# EAGLE board HackmodWear (EAGLE 9.1.0)
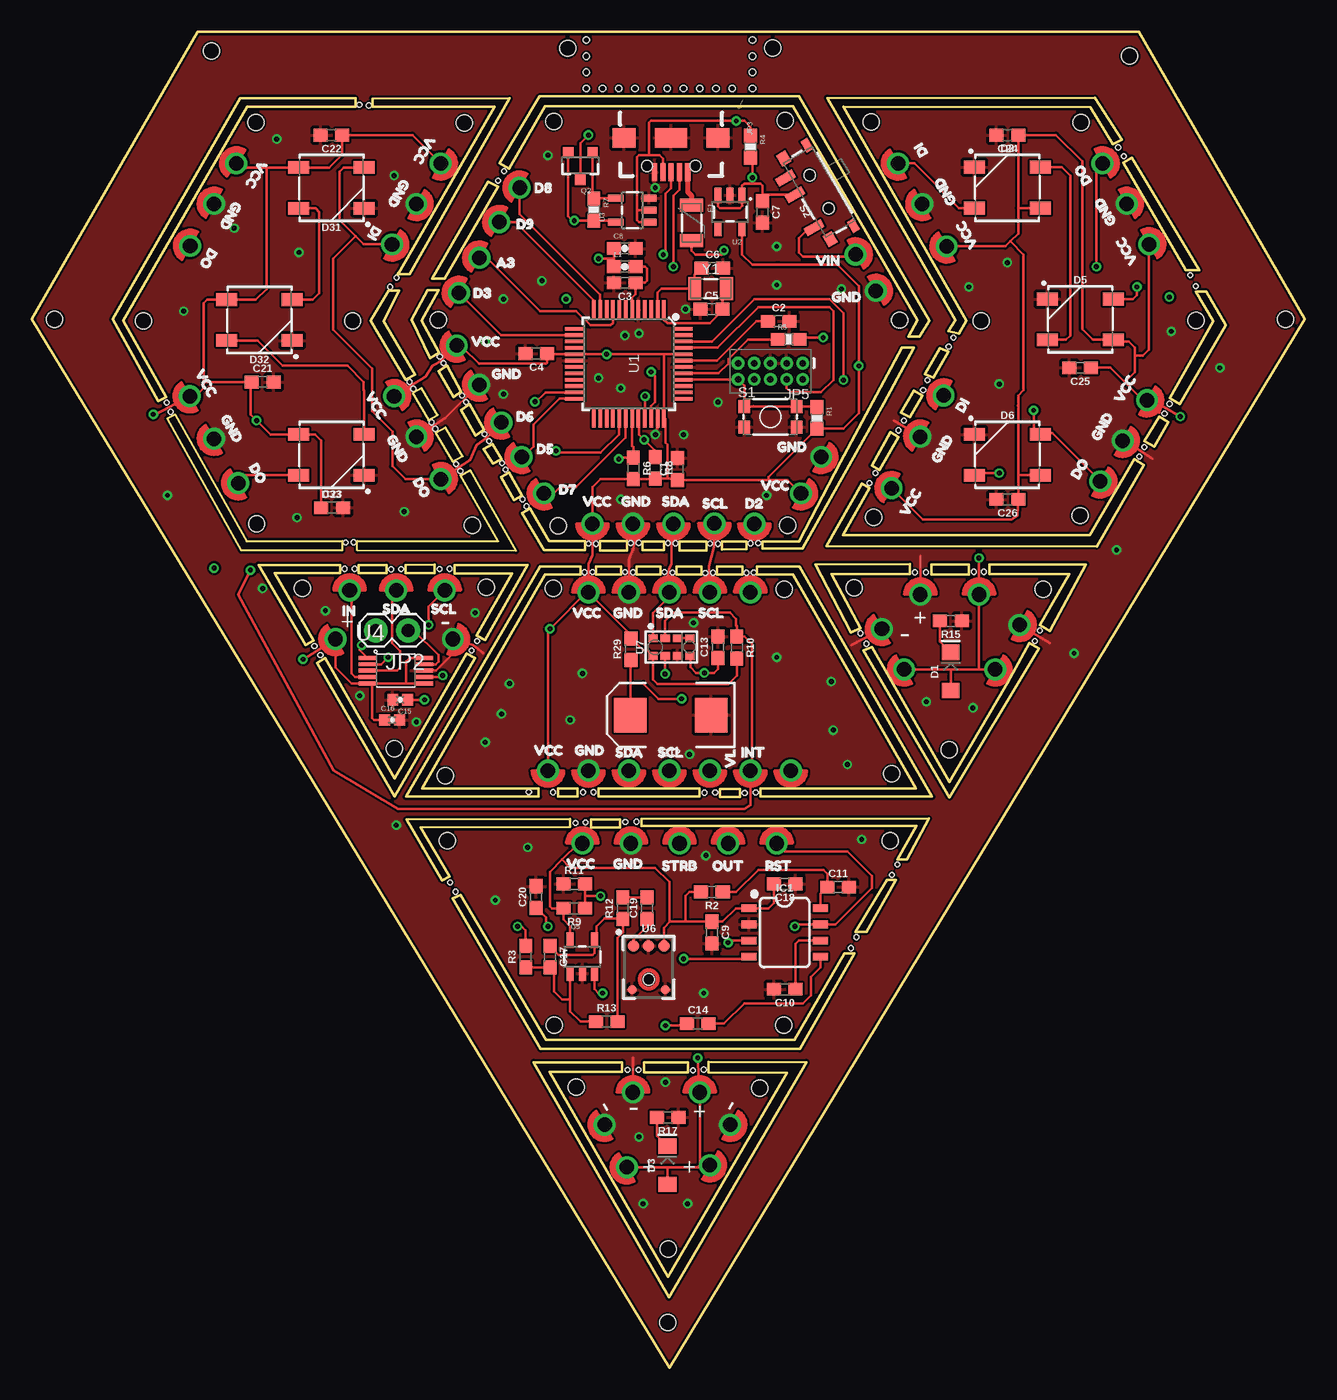
[diagram p0: board, top side]
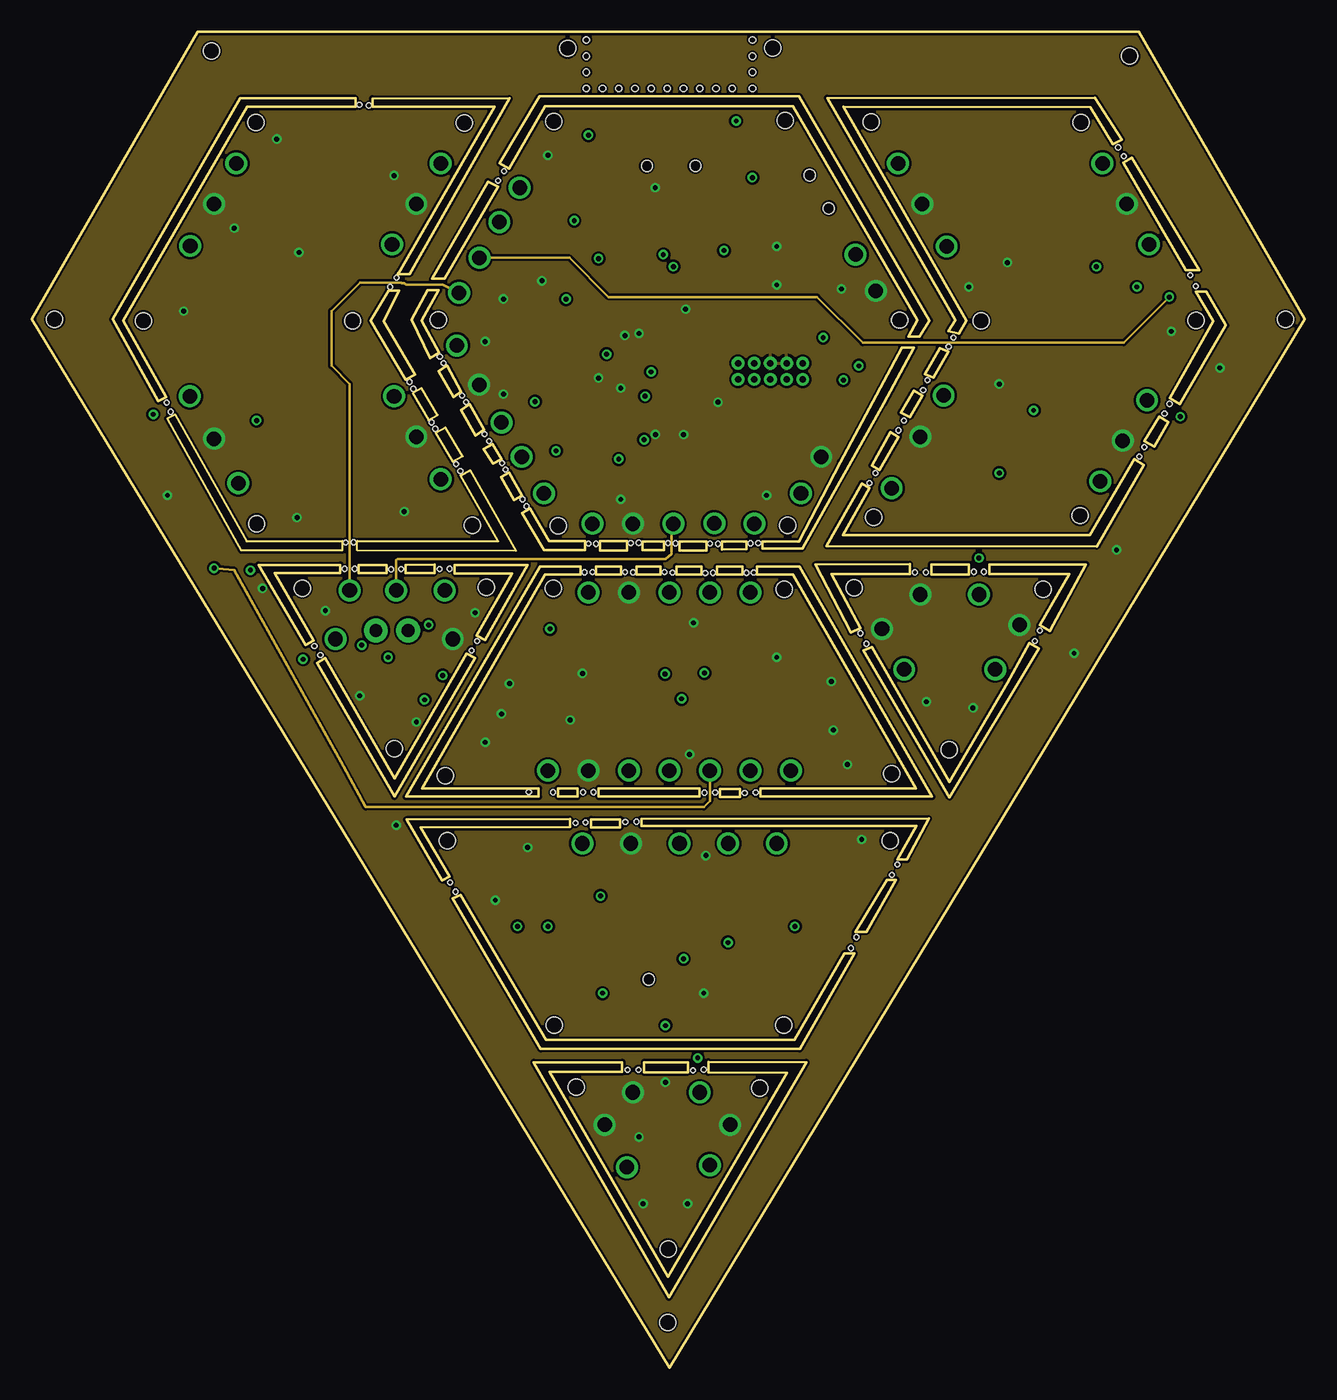
[diagram p1: board, inner layer Route2]
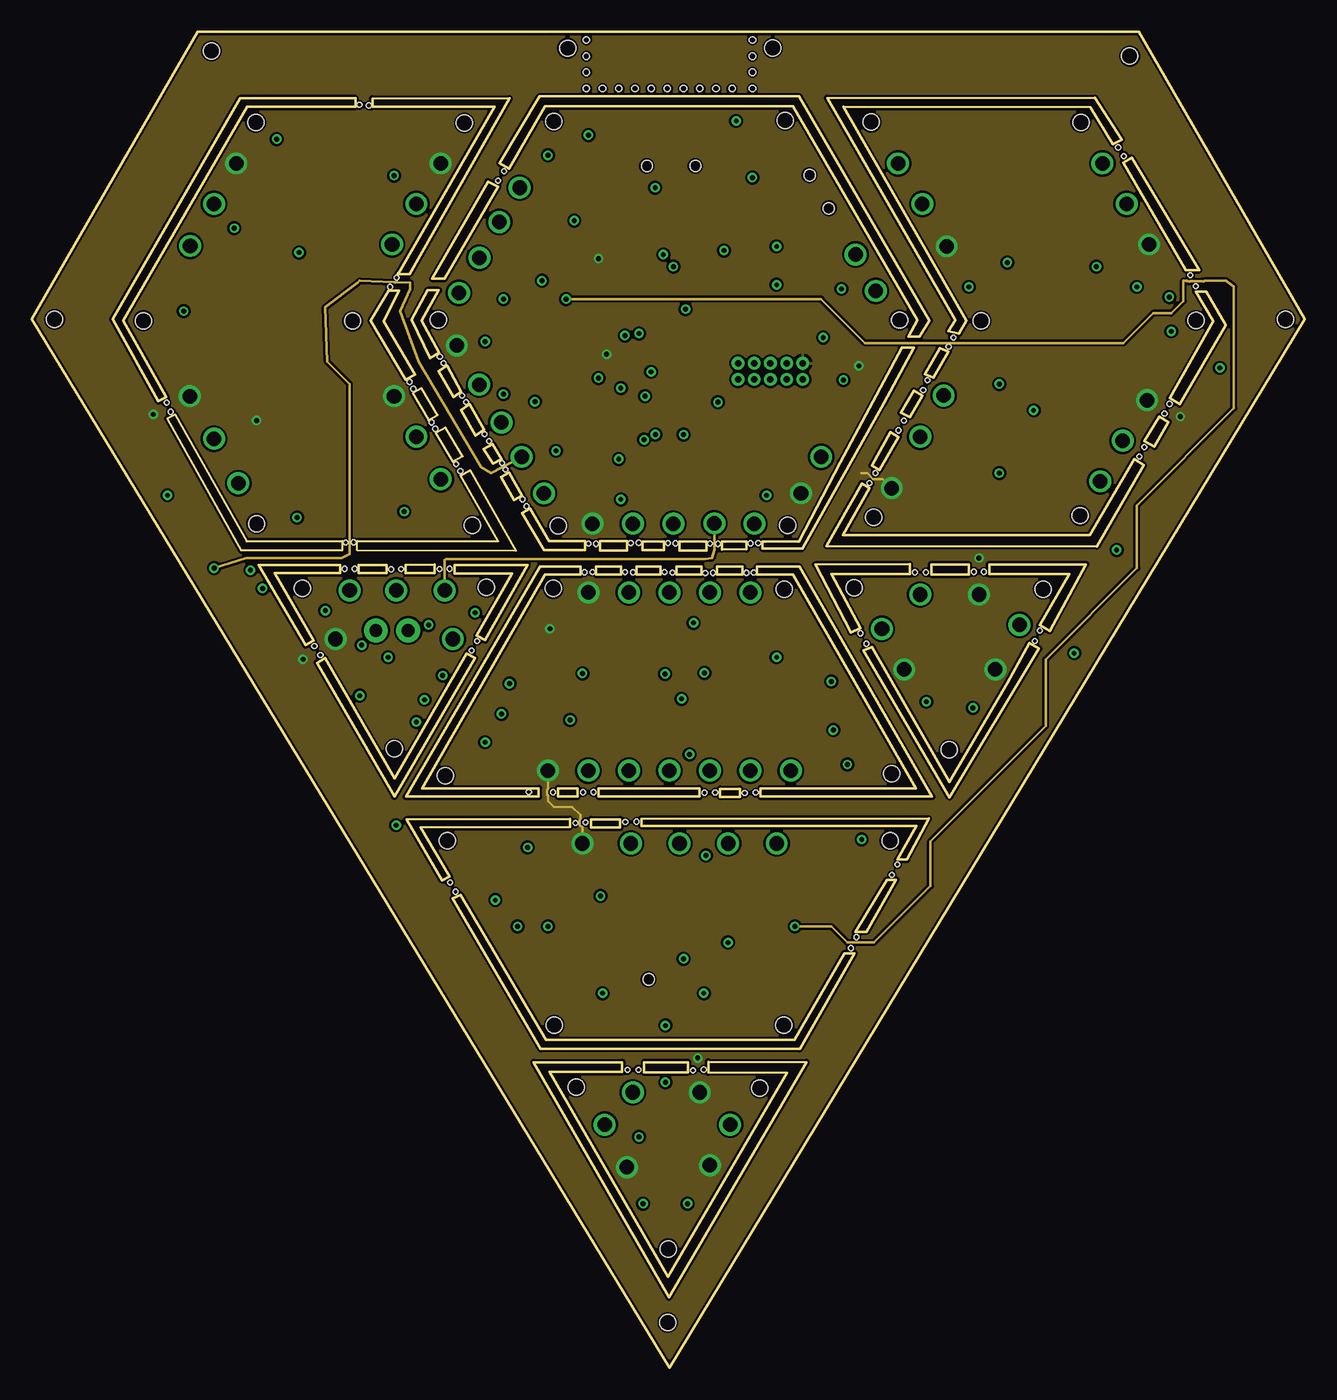
[diagram p2: board, inner layer Route15]
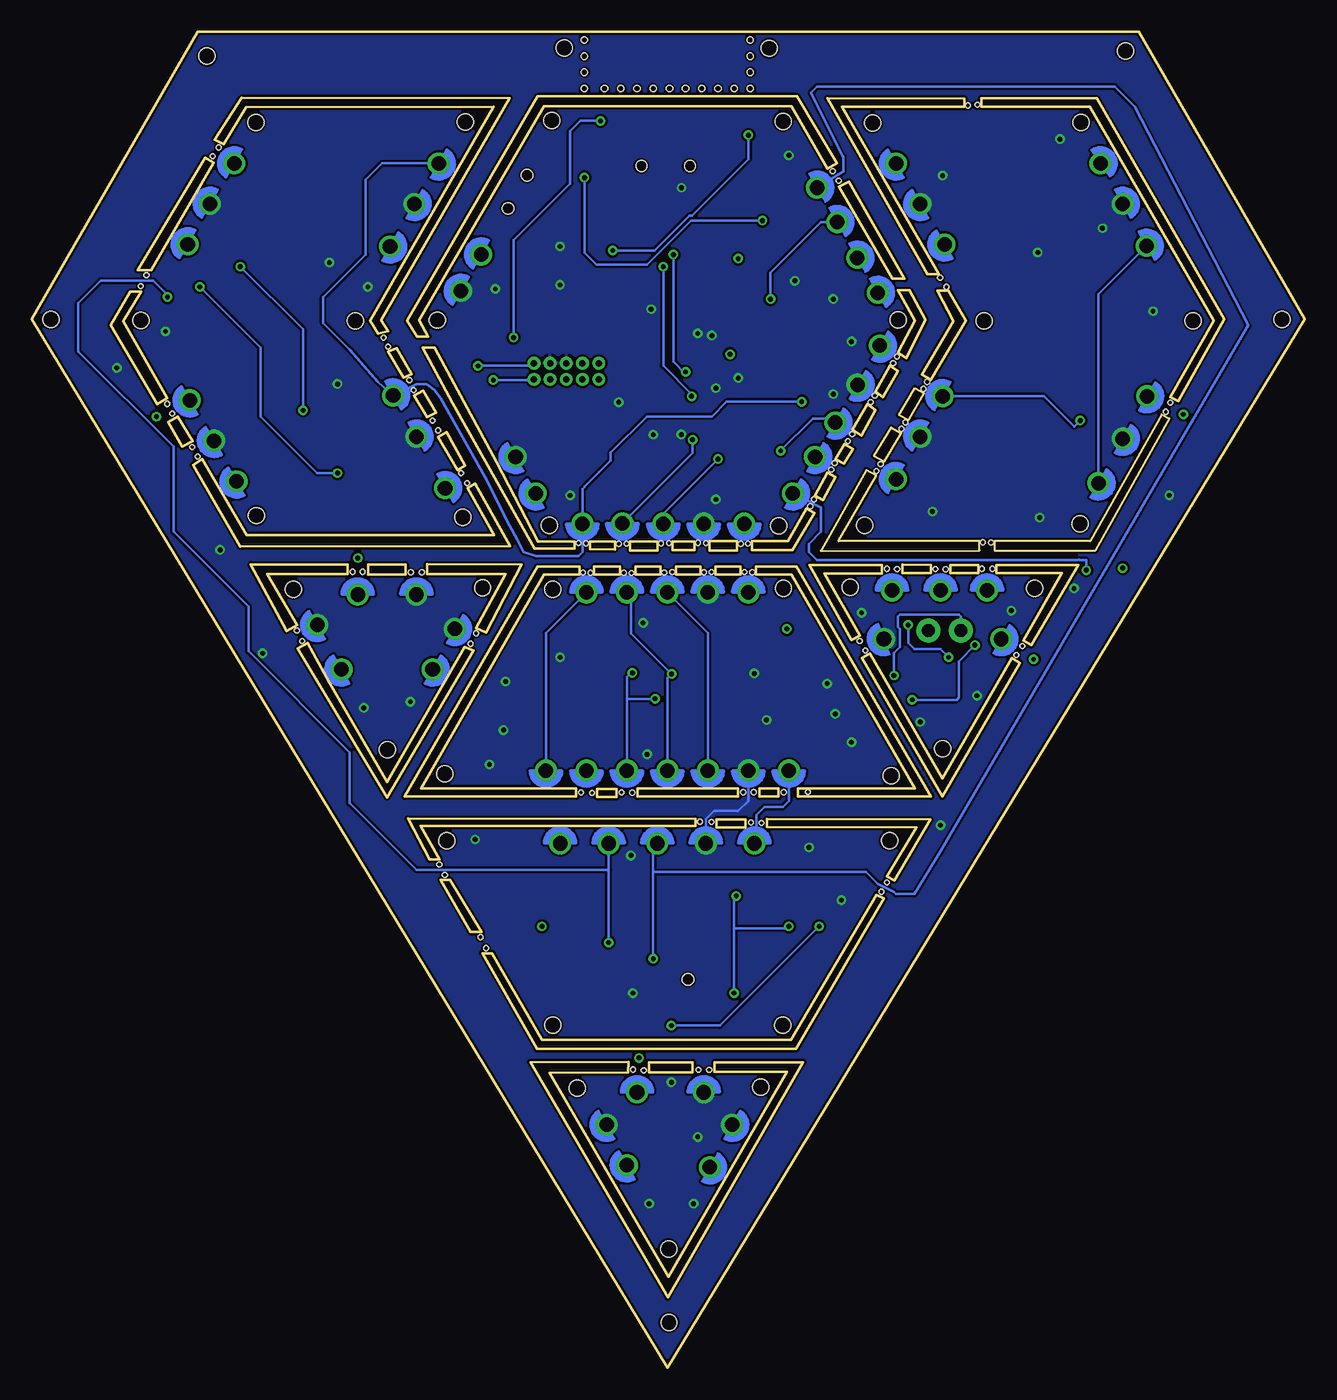
[diagram p3: board, bottom side, seen from below]

Size 99.85 x 104.77 mm. Coordinates in mm from the lower left corner, seen from the top.
Outline: 292 segments
Copper layers (1*2*15*16): Top 0.035559375mm / dielectric 0.47751875mm / Route2 0.035559375mm / dielectric 0.47751875mm / Route15 0.035559375mm / dielectric 0.47751875mm / Bottom 0.035559375mm
Design rules "SparkFun-4-layer-TIGHT": minimum track width 7mil, minimum drill 15mil, track to track 7mil, track to pad 7mil, pad to pad 7mil, via to via 7mil, smd to smd 7mil, copper to edge 7mil, drill to drill 7mil, minimum pad ring 7mil, minimum via ring 7mil, stop-mask expansion 4mil, vias tented up to drill 25mil, thermal gap 10mil
Holes 1.27 mm at 32.43,46.41 34.54,66.06 79.33,61.05 33.91,97.63 40.97,26.87 67.31,41.33 59.28,66.06 21.21,61.14 28.42,48.54 42.03,103.49 58.99,26.86 35.66,61.21 86.12,102.87 65.84,97.69 66.04,66.69 82.28,97.69 40.9,61.12 59,61.05 41.28,66.02 31.89,82.19 40.93,97.76 49.88,3.54 8.76,82.12 17.56,97.66 17.63,66.2 71.96,48.48 74.47,82.11 64.5,61.18 67.45,46.58 82.23,66.83 58.1,103.5 25.16,82.09 14.08,103.27 42.7,22 57.08,21.94 32.58,41.34 59.09,97.83 68.05,82.16 91.3,82.14 49.91,9.32 1.79,82.22 98.34,82.23
Holes 0.51 mm at 43.5,100.33 43.5,101.6 43.5,102.87 43.5,104.14 56.52,100.33 56.52,101.6 56.52,102.87 56.52,104.14 48.58,100.33 47.31,100.33 46.04,100.33 44.77,100.33 53.66,100.33 52.39,100.33 51.12,100.33 49.85,100.33 54.93,100.33
Holes 0.38 mm at 25.69,99.05 26.43,99 28.61,85.49 28.11,84.77 29.63,77.32 29.92,76.78 31.34,74.15 31.65,73.64 33.27,70.89 33.6,70.33 32,79.29 32.3,78.78 33.74,76.23 34.06,75.72 35.51,73.23 35.85,72.66 36.88,70.96 37.16,70.43 38.49,68.1 38.8,67.56 43.68,64.65 44.25,64.62 46.98,64.67 47.6,64.7 49.89,64.69 50.5,64.66 53.2,64.64 53.82,64.62 56.38,64.66 56.97,64.67 56.05,62.35 56.62,62.38 53.43,62.35 52.82,62.34 50.25,62.36 49.62,62.4 47.14,62.39 46.53,62.41 43.97,62.4 43.35,62.39 24.61,64.73 25.25,64.74 24.52,62.66 25.32,62.66 28.18,62.62 28.97,62.64 31.98,62.64 32.78,62.66 34.93,56.99 34.48,56.25 22.16,56.6 22.63,55.89 38.98,45.15 40.88,45.13 43.23,45.13 44.06,45.13 52.76,45.09 53.61,45.1 55.92,45.07 56.78,45.1 42.63,42.72 43.43,42.77 46.55,42.79 47.43,42.82 32.79,38.07 33.22,37.33 67.46,38.64 67.89,39.47 64.67,33.76 64.24,32.9 51.85,23.32 52.71,23.37 46.72,23.35 47.57,23.36 65,57.6 65.46,56.78 79.07,57.8 78.66,57 74.69,62.43 73.9,62.43 70.13,62.39 69.27,62.39 87.27,72.21 86.86,71.47 89.24,75.6 88.85,74.83 91.31,84.82 90.87,85.68 85.66,95.03 85.2,95.71 72.28,80.8 71.91,80.08 70.24,77.45 69.91,76.69 68.41,74.29 67.98,73.51 66.18,70.17 65.71,69.37 36.56,93.1 37.03,93.83 10.57,75.7 10.9,74.97

## Footprints (pad centres in the part's own frame; a part is rotated, then mirrored left to right if it is on the bottom)
0603 = smd 1.1 x 1: 1 -0.85,0; 2 0.85,0
0603-CAP = smd 1.1 x 1: 1 -0.85,0; 2 0.85,0
EIA7343 = smd 2.55 x 2.7: A 3.17,0; C -3.17,0
0402-CAP = smd 0.85 x 0.9: 1 -0.58,0; 2 0.58,0
LED-1206 = smd 1.2 x 1.4: A -1.5,0; C 1.5,0
WS2812B = smd 1.651 x 1: 1 2.577,-1.6; 2 2.577,1.6; 3 -2.577,1.6; 4 -2.577,-1.6
PTC-1206 = smd 1 x 1.8: 1 -1.4,0; 2 1.4,0
SO08 = smd 0.6 x 1.2: 1 -1.905,-2.8; 2 -0.635,-2.8; 3 0.635,-2.8; 4 1.905,-2.8; 5 1.905,2.8; 6 0.635,2.8; 7 -0.635,2.8; 8 -1.905,2.8
1X01 = drill 1.143: P$1 0,0
1X02@1 = drill 1.016 pad 1.88: 1 0,0; 2 2.54,0
USB-AB-MICRO-SMD_V03 = smd 1.4 x 0.4: D+1 2.7,0; D-1 2.7,0.65; GND1 2.7,-1.3; ID1 2.7,-0.65; VBUS1 2.7,1.3 | smd 1.5 x 1.8: SHIELD1 0,3.68; SHIELD3 0,-3.68 | smd 1.5 x 2.5: SHIELD2 0,0 | hole 0.85: 2.2,1.9; 2.2,-1.9
2X5-PTH-1.27MM = drill 0.508 pad 1: 1 -2.54,-0.635; 2 -2.54,0.635; 3 -1.27,-0.635; 4 -1.27,0.635; 5 0,-0.635; 6 0,0.635; 7 1.27,-0.635; 8 1.27,0.635; 9 2.54,-0.635; 10 2.54,0.635
SOT23-3 = smd 0.8 x 0.9: 1 -0.95,-1; 2 0.95,-1; 3 0,1.1
0603-RES@1 = smd 1.1 x 1: 1 -0.85,0; 2 0.85,0
TACTILE_SWITCH_SMD_4.6X2.8MM = smd 0.9 x 1: 1 -2.05,-0.8; 2 2.05,-0.8; 3 2.05,0.8; 4 -2.05,0.8
SWITCH_SPST_SMD_A = smd 0.7 x 1.5: 1 -2.25,-1.75; 2 -0.75,-1.75; 3 2.25,-1.75 | smd 1 x 0.6: GND1 -3.65,1; GND3 3.65,1 | smd 1 x 0.8: GND2 -3.65,-1.1; GND4 3.65,-1.1 | hole 0.9: -1.5,0; 1.5,0
TQFP-48 = smd 1.5 x 0.28: 1 -4.25,2.75; 2 -4.25,2.25; 3 -4.25,1.75; 4 -4.25,1.25; 5 -4.25,0.75; 6 -4.25,0.25; 7 -4.25,-0.25; 8 -4.25,-0.75; 9 -4.25,-1.25; 10 -4.25,-1.75; 11 -4.25,-2.25; 12 -4.25,-2.75; 25 4.25,-2.75; 26 4.25,-2.25; 27 4.25,-1.75; 28 4.25,-1.25; 29 4.25,-0.75; 30 4.25,-0.25; 31 4.25,0.25; 32 4.25,0.75; 33 4.25,1.25; 34 4.25,1.75; 35 4.25,2.25; 36 4.25,2.75 | smd 0.28 x 1.5: 13 -2.75,-4.25; 14 -2.25,-4.25; 15 -1.75,-4.25; 16 -1.25,-4.25; 17 -0.75,-4.25; 18 -0.25,-4.25; 19 0.25,-4.25; 20 0.75,-4.25; 21 1.25,-4.25; 22 1.75,-4.25; 23 2.25,-4.25; 24 2.75,-4.25; 37 2.75,4.25; 38 2.25,4.25; 39 1.75,4.25; 40 1.25,4.25; 41 0.75,4.25; 42 0.25,4.25; 43 -0.25,4.25; 44 -0.75,4.25; 45 -1.25,4.25; 46 -1.75,4.25; 47 -2.25,4.25; 48 -2.75,4.25
SOT23-5 = smd 0.55 x 1.2: 1 -0.95,-1.3; 2 0,-1.3; 3 0.95,-1.3; 4 0.95,1.3; 5 -0.95,1.3
VSSOP-10 = smd 1.45 x 0.3: P$1 -1.905,1.06; P$2 -1.905,0.56; P$3 -1.905,0.06; P$4 -1.905,-0.44; P$5 -1.905,-0.94; P$6 2.495,-0.94; P$7 2.495,-0.44; P$8 2.495,0.06; P$9 2.495,0.56; P$10 2.495,1.06
ADMP401 = smd 0.9 x 0.9: 1 -1.2,2.62; 5 1.2,2.62; 6 0,2.62 | smd 0.7 x 0.7: 2 1.3,-0.8; 4 -1.3,-0.8 | hole 0.9: 0,0
APDS-9960 = smd 0.6 x 0.72: 1 0.7,1.455; 2 0.7,0.485; 3 0.7,-0.485; 4 0.7,-1.455; 5 -0.7,-1.455; 6 -0.7,-0.485; 7 -0.7,0.485; 8 -0.7,1.455
CRYSTAL-SMD-3.2X1.5MM = smd 1 x 1.8: P$1 -1.25,0; P$2 1.25,0

## Placement (x,y rotation side)
C1  0.1uF  [0603]  50.64,70.48 90 top
C2  0.1uF  [0603]  58.58,82.07 0 top
C3  0.1uF  [0603]  46.51,85.09 180 top
C4  0.1uF  [0603]  39.56,79.53 180 top
C5  15pF  [0603]  53.31,83.02 0 top
C6  15pF  [0603]  53.37,86.24 0 top
C7  0.1uF  [0603]  57.31,90.65 270 top
C8  2.2uF  [0603-CAP]  46.51,87.79 0 top
C9  0.1uF  [0603]  53.34,34.13 270 top
C10  0.1uF  [0603]  59.05,29.69 180 top
C11  33pF  [0603]  63.25,37.69 0 top
C12  100uF  [EIA7343]  50.11,51.19 180 top
C13  1.0uF  [0603]  53.82,56.52 90 top
C14  10nF  [0603]  52.23,26.99 0 top
C15  1.0uF  [0402-CAP]  28.89,52.39 180 top
C16  1.0uF  [0402-CAP]  28.26,50.8 0 top
C17  100pF  [0603]  40.64,32.23 270 top
C18  0.1uF  [0603]  59.05,37.94 180 top
C19  4.7uF  [0603]  48.26,36.04 90 top
C20  1.0uF  [0603]  39.55,36.91 90 top
C21  0.1uF  [0603]  18.1,77.31 0 top
C22  0.1uF  [0603]  23.49,96.68 180 top
C23  0.1uF  [0603]  23.55,67.45 0 top
C24  0.1uF  [0603]  76.52,96.68 180 top
C25  0.1uF  [0603]  82.23,78.42 180 top
C26  0.1uF  [0603]  76.52,68.1 180 top
D1  [LED-1206]  72.07,54.61 90 top
D2  WS2812B  [WS2812B]  76.52,92.55 0 top
D3  [LED-1206]  49.85,15.88 90 top
D5  WS2812B  [WS2812B]  82.24,82.22 0 top
D6  WS2812B  [WS2812B]  76.52,71.6 0 top
D31  WS2812B  [WS2812B]  23.5,92.53 180 top
D32  WS2812B  [WS2812B]  17.85,82.17 180 top
D33  WS2812B  [WS2812B]  23.49,71.6 180 top
F1  500mA  [PTC-1206]  51.75,89.79 270 top
IC1  MSGEQ7N  [SO08]  59.05,34.13 270 top
J1  [1X01]  23.81,57.15 120 top
J2  [1X01]  28.57,60.96 0 top
J3  [1X01]  38.42,71.44 120 top
J4  [1X01]  32.39,60.96 0 top
J5  [1X01]  40.16,68.58 120 top
J6  [1X01]  35.08,77.1 120 top
J7  [1X01]  67.44,68.98 60 top
J8  [1X01]  38.26,92.55 60 top
J9  [1X01]  36.67,89.85 60 top
J10  [1X01]  35.11,87.05 60 top
J11  [1X01]  47.15,66.2 180 top
J12  [1X01]  50.32,66.2 180 top
J13  [1X01]  50.01,46.83 180 top
J14  [1X01]  56.67,66.2 180 top
J15  [1X01]  53.18,60.8 0 top
J16  [1X01]  50.01,60.8 0 top
J17  [1X01]  43.66,60.8 0 top
J18  [1X01]  36.83,74.14 120 top
J19  [1X01]  46.83,60.8 0 top
J20  [1X01]  33.02,57.15 250 top
J21  [1X01]  59.53,46.83 180 top
J22  [1X01]  24.92,60.96 0 top
J23  [1X01]  33.5,84.3 60 top
J24  [1X01]  53.18,46.83 180 top
J25  [1X01]  32.07,94.46 240 top
J26  [1X01]  32.07,69.69 300 top
J27  [1X01]  14.29,91.28 60 top
J28  [1X01]  40.48,46.83 180 top
J29  [1X01]  43.66,46.83 180 top
J30  [1X01]  43.18,41.12 0 top
J31  [1X01]  46.99,41.12 0 top
J32  [1X01]  28.26,88.11 240 top
J33  [1X01]  30.16,73.02 300 top
J34  [1X01]  28.42,76.2 300 top
J35  [1X01]  50.8,41.12 0 top
J36  [1X01]  58.42,41.12 0 top
J37  [1X01]  54.61,41.12 0 top
J38  [1X01]  53.54,66.23 180 top
J39  [1X01]  46.83,46.83 180 top
J40  [1X01]  56.36,46.83 180 top
J41  [1X01]  16.19,69.37 120 top
J42  [1X01]  71.52,76.25 60 top
J43  [1X01]  30.16,91.28 240 top
J44  [1X01]  16.03,94.46 55 top
J45  [1X01]  12.38,76.2 120 top
J46  [1X01]  14.29,72.87 120 top
J47  [1X01]  71.75,87.95 120 top
J48  [1X01]  83.98,94.46 300 top
J49  [1X01]  85.88,91.28 300 top
J50  [1X01]  83.8,69.52 240 top
J51  [1X01]  69.85,91.28 120 top
J52  [1X01]  87.63,88.11 300 top
J53  [1X01]  67.94,94.46 120 top
J54  [1X01]  12.42,87.99 60 top
J55  [1X01]  69.69,73.02 60 top
J56  [1X01]  33.34,80.17 120 top
J57  [1X01]  87.47,75.88 240 top
J58  [1X01]  85.57,72.71 240 top
J59  [1X01]  77.47,58.26 240 top
J60  [1X01]  75.56,54.77 240 top
J61  [1X01]  66.67,57.94 120 top
J62  [1X01]  68.42,54.77 120 top
J63  [1X01]  69.69,60.64 0 top
J64  [1X01]  74.3,60.64 0 top
J65  [1X01]  47.15,21.59 0 top
J66  [1X01]  53.18,15.88 240 top
J67  [1X01]  44.93,19.05 120 top
J68  [1X01]  46.67,15.72 120 top
J69  [1X01]  54.77,19.05 240 top
J70  [1X01]  52.39,21.59 0 top
J71  [1X01]  64.61,87.31 300 top
J72  [1X01]  66.2,84.45 300 top
J73  [1X01]  43.97,66.2 180 top
J74  [1X01]  56.36,60.8 0 top
J75  [1X01]  61.91,71.44 240 top
J76  [1X01]  60.33,68.58 240 top
JP2  [1X02@1]  29.52,57.83 180 top
JP3  [USB-AB-MICRO-SMD_V03]  50.15,96.46 270 top
JP5  CORTEX_DEBUGPTH  [2X5-PTH-1.27MM]  57.93,78.15 180 top
L1  FB - 30Ohm  [0603]  46.51,86.36 0 top
Q2  2.5A/30V  [SOT23-3]  43.02,94.3 180 top
R1  10K  [0603-RES@1]  61.58,74.49 270 top
R2  200k  [0603]  53.34,37.31 180 top
R3  22k  [0603]  38.73,32.23 90 top
R4  100k  [0603-RES@1]  56.36,95.77 270 top
R5  330  [0603-RES@1]  59.37,80.64 0 top
R6  2.2k  [0603]  47.18,70.54 270 top
R7  47K  [0603-RES@1]  44.09,90.83 270 top
R8  2.2k  [0603]  48.9,70.58 270 top
R9  10k  [0603]  42.55,36.04 180 top
R10  100k  [0603]  55.29,56.48 270 top
R11  10k  [0603]  42.55,37.94 0 top
R12  1.5k  [0603]  46.36,36.04 90 top
R13  100k  [0603]  45.09,27.15 0 top
R15  330  [0603]  72.09,58.58 180 top
R17  330  [0603]  49.89,19.63 180 top
R29  0  [0603]  46.99,56.36 90 top
S1  RESET  [TACTILE_SWITCH_SMD_4.6X2.8MM]  57.93,74.57 0 top
S2  [SWITCH_SPST_SMD_A]  61.75,92.23 300 top
U1  ATSAMD21G-A  [TQFP-48]  46.83,78.74 270 top
U2  3.3V  [SOT23-5]  54.77,90.65 180 top
U3  74AHC1G125  [SOT23-5]  47.1,90.79 90 top
U4  DRV2605L  [VSSOP-10]  28.26,54.61 0 top
U5  OPA344  [SOT23-5]  43.18,32.23 0 top
U6  ADMP401  [ADMP401]  48.39,30.45 0 top
U7  APDS-9960  [APDS-9960]  50.16,56.52 90 top
U$1  [GND2]  45.56,67.94 0 top
U$2  [A313]  35.72,86.68 0 top
U$3  [D517]  38.89,72.07 0 top
U$4  [D314]  33.81,84.3 0 top
U$5  [DO7]  16.99,71.44 300 top
U$6  [D616]  37.31,74.61 0 top
U$7  [D718]  40.64,68.9 0 top
U$8  [D811]  38.73,92.55 0 top
U$9  [D912]  37.31,89.69 0 top
U$10  [GND2]  14.76,75.25 300 top
U$11  [DI6]  27.46,90.01 240 top
U$12  [GND2]  35.4,77.95 0 top
U$13  [SCL5]  51.91,67.79 0 top
U$14  [SDA4]  48.74,67.94 0 top
U$15  [STRB8]  48.74,39.37 0 top
U$16  [VCC1]  41.12,39.53 0 top
U$17  [RST9]  56.83,39.37 0 top
U$18  [OUT10]  52.71,39.37 0 top
U$19  [GND2]  44.93,39.53 0 top
U$20  [VCC1]  41.59,59.21 0 top
U$21  [GND2]  44.93,59.21 0 top
U$22  [SDA4]  48.26,59.21 0 top
U$23  [SCL5]  51.59,59.21 0 top
U$24  [SCL5]  48.42,48.26 0 top
U$25  [SDA4]  45.09,48.26 0 top
U$26  [GND2]  57.79,72.23 0 top
U$27  [INT23]  54.93,48.26 0 top
U$28  [VL22]  54.77,46.35 90 top
U$29  [GND2]  41.91,48.42 0 top
U$30  [VCC21]  38.58,48.42 0 top
U$31  [VCC1]  56.36,69.22 0 top
U$32  [VCC1]  42.39,67.94 0 top
U$33  [VCC1]  33.66,80.49 0 top
U$34  [D219]  55.25,67.79 0 top
U$35  [VCC1]  12.7,78.9 300 top
U$36  [VIN20]  60.8,86.84 0 top
U$37  [GND2]  62.07,83.98 0 top
U$38  [GND2]  62.07,83.98 0 top
U$39  [VCC1]  18.57,95.25 240 top
U$40  [GND2]  29.69,93.66 240 top
U$41  [VCC1]  31.75,97.16 240 top
U$42  [GND2]  16.51,91.92 240 top
U$43  [DO7]  14.61,88.27 240 top
U$44  [VCC1]  26.04,77.15 300 top
U$45  [GND2]  27.78,73.66 300 top
U$46  [DO7]  29.84,70.33 300 top
U$47  [VCC1]  74.3,87.15 120 top
U$48  [VCC1]  86.84,85.88 120 top
U$49  [GND2]  72.55,90.65 120 top
U$50  [GND2]  85.09,89.06 120 top
U$51  [DI6]  70.33,94.46 120 top
U$52  [DO7]  83.18,92.23 120 top
U$53  [DO7]  81.44,69.22 60 top
U$54  [VCC1]  67.94,66.2 60 top
U$55  [GND2]  70.48,70.48 60 top
U$56  [GND2]  83.03,72.23 60 top
U$57  [DI6]  72.39,74.45 60 top
U$58  [VCC1]  84.77,75.09 60 top
U$59  [SDA4]  26.83,59.53 0 top
U$60  [SCL5]  30.64,59.53 0 top
U$62  [IN3]  23.65,59.37 0 top
Y1  32.768kHz  [CRYSTAL-SMD-3.2X1.5MM]  53.24,84.62 0 top

## Library data of the parts
C1-C4 C7 C9 C10 C18 C21-C26 = SparkFun-Capacitors; PROD_ID: CAP-00810
C5 C6 = SparkFun-Capacitors; PROD_ID: CAP-07881
C8 = SparkFun-Capacitors; PROD_ID: CAP-07888
C11 = SparkFun-Capacitors; PROD_ID: CAP-10142
C12 = SparkFun-Capacitors; PROD_ID: CAP-07890
C13 C20 = SparkFun-Capacitors; PROD_ID: CAP-00868
C14 = SparkFun-Capacitors; PROD_ID: CAP-00867
C15 C16 = SparkFun-Capacitors; PROD_ID: CAP-12417
C17 = SparkFun-Capacitors; PROD_ID: CAP-07883
C19 = SparkFun-Capacitors; PROD_ID: CAP-08280
D1 D3 = SparkFun-LED
D2 D5 D6 D31-D33 = SparkFun-LED; PROD_ID: DIO-12503
F1 = SparkFun-PowerIC; PROD_ID: RES-11150
IC1 = SparkFun-IC-Special-Function; PROD_ID: IC-10141
J1-J76 JP2 = SparkFun-Connectors
JP3 = SparkFun-Connectors; PROD_ID: CONN-11794
JP5 = samd21-temp
L1 = SparkFun-Passives; PROD_ID: RES-07859
Q2 = SparkFun-DiscreteSemi; PROD_ID: TRANS-11308
R1 R9 R11 = SparkFun-Resistors; PROD_ID: RES-00824
R2 = SparkFun-Resistors; PROD_ID: RES-09385
R3 = SparkFun-Resistors; PROD_ID: RES-07853
R4 R10 R13 = SparkFun-Resistors; PROD_ID: RES-07828
R5 R15 R17 = SparkFun-Resistors; PROD_ID: RES-00818
R6 R8 = SparkFun-Resistors; PROD_ID: RES-08272
R7 = SparkFun-Resistors; PROD_ID: RES-07871
R12 = SparkFun-Resistors; PROD_ID: RES-08306
R29 = SparkFun-Resistors; PROD_ID: RES-08609
S1 = samd21-temp; PROD_ID: SWCH-13065
S2 = SparkFun-Switches; PROD_ID: SWCH-10651; SF_SKU: COM-10860
U1 = samd21-temp; PROD_ID: IC-13064
U2 = SparkFun-PowerIC; PROD_ID: VREG-12457
U3 = SparkFun-DigitalIC; PROD_ID: IC-11920
U4 = SparkFun-PowerIC; PROD_ID: IC-13504
U5 = SparkFun
U6 = SparkFun-Sensors; PROD_ID: IC-09773
U7 = SparkFun-Sensors; PROD_ID: SEN-12005
U$1-U$60 U$62 = buzzard_labels(2)
Y1 = samd21-temp; PROD_ID: XTAL-13062

## Nets
3.3V: C1.1 C4.1 C8.1 C9.1 C16.1 C18.2 C21.1 C22.1 C23.1 C24.1 C25.1 C26.1 D1.A D2.1 D3.A D5.1 D6.1 D31.1 D32.1 D33.1 IC1.1 J1.P$1 J7.P$1 J17.P$1 J25.P$1 J28.P$1 J30.P$1 J34.P$1 J44.P$1 J45.P$1 J47.P$1 J52.P$1 J56.P$1 J57.P$1 J60.P$1 J62.P$1 J64.P$1 J66.P$1 J68.P$1 J70.P$1 J73.P$1 J76.P$1 JP5.1 L1.1 R1.2 R2.2 R6.2 R8.2 R9.2 R10.2 R29.2 U1.17 U1.36 U1.44 U2.5 U4.P$5 U4.P$6 U4.P$10 U5.5 U6.5 U7.8
!RESET: JP5.10 R1.1 S1.3 S1.4 U1.40
A0: U1.3
A1: U1.7
A2: U1.8
A3: IC1.3 J10.P$1 J37.P$1 U1.9
AREF: U1.4
AUD: C17.2 R3.1 R13.1 U5.1
D0/RXI: U1.16
D1/TXO: U1.15
D2: D2.4 J14.P$1 J42.P$1 J53.P$1 U1.23
D3: J22.P$1 J23.P$1 U1.14 U4.P$4
D4: U1.13
D5: C12.A C13.1 J3.P$1 J24.P$1 R29.1 U1.24 U7.5
D6: D31.4 J18.P$1 J26.P$1 J32.P$1 U1.29
D7: J5.P$1 J40.P$1 R10.1 U1.30 U7.2
D8: IC1.4 J8.P$1 J35.P$1 U1.11
D9: IC1.7 J9.P$1 J36.P$1 U1.12
D10/SS: U1.27
D11/MOSI: U1.25
D12/MISO: U1.28
D13/SCK: U1.26
DO: D33.2 J41.P$1 J54.P$1
DOUT: D6.2 J48.P$1 J50.P$1
GND: C1.2 C2.2 C3.2 C4.2 C5.1 C6.2 C7.2 C8.2 C9.2 C10.2 C11.2 C12.C C13.2 C15.2 C16.2 C18.1 C20.2 C21.2 C22.2 C23.2 C24.2 C25.2 C26.2 D2.3 D5.3 D6.3 D31.3 D32.3 D33.3 IC1.2 J6.P$1 J11.P$1 J19.P$1 J20.P$1 J27.P$1 J29.P$1 J31.P$1 J33.P$1 J43.P$1 J46.P$1 J49.P$1 J51.P$1 J55.P$1 J58.P$1 J59.P$1 J61.P$1 J63.P$1 J65.P$1 J67.P$1 J69.P$1 J72.P$1 J75.P$1 JP3.GND1 JP3.SHIELD1 JP3.SHIELD2 JP3.SHIELD3 JP5.3 JP5.5 R11.1 R15.1 R17.1 S1.1 S1.2 U1.5 U1.18 U1.35 U1.42 U2.2 U3.3 U4.P$8 U5.2 U6.2 U6.4 U6.6 U7.6
ID: JP3.ID1 R4.1 R5.2 U3.1 U3.2
N$1: F1.1 JP3.VBUS1
N$2: C5.2 U1.1 Y1.P$2
N$3: C19.1 U6.1
N$4: C6.1 U1.2 Y1.P$1
N$5: U7.3 U7.4
N$6: C17.1 R12.1 R13.2 U5.4
N$7: F1.2 Q2.3
N$8: J21.P$1 J74.P$1
N$9: Q2.1 R7.1 U3.4
N$10: C19.2 R12.2
N$11: C20.1 R9.1 R11.2 U5.3
N$12: D1.C R15.2
N$13: C15.1 U4.P$1
N$14: D31.2 D32.4
N$15: D3.C R17.2
N$16: D32.2 D33.4
N$17: C14.2 IC1.5
N$18: C14.1 R3.2
N$19: C10.1 IC1.6
N$20: C11.1 IC1.8 R2.1
N$21: J71.P$1 S2.3
N$22: D2.2 D5.4
N$23: D5.2 D6.4
N$24: JP2.1 U4.P$9
N$25: JP2.2 U4.P$7
RX_LED: U1.48
SCL: J4.P$1 J13.P$1 J15.P$1 J38.P$1 R8.1 U1.32 U4.P$2 U7.7
SDA: J2.P$1 J12.P$1 J16.P$1 J39.P$1 R6.1 U1.31 U4.P$3 U7.1
SWCLK: JP5.4 U1.45
SWDIO: JP5.2 U1.46
TX_LED: U1.39
USB_D+: JP3.D+1 U1.34
USB_D-: JP3.D-1 U1.33
USB_HOST_EN: R5.1 U1.41
VDDANA: C3.1 L1.2 U1.6
VDDCORE: C2.1 U1.43
VIN: C7.1 Q2.2 R4.2 R7.2 S2.2 U2.1 U2.3 U3.5

## Tracks (layer width: path | path; a pad name or v marks a point on that pad's centre or on a via)
3.3V  (via drill 0.38)
  Top 0.178: U2.5 55.72,87.32 56.52,86.52 58.42,86.52 58.58,86.52 | U1.17 40.45,79.49 C4.1 40.41,78.83 40.32,78.74 35.08,78.74 33.84,79.98 | 33.84,79.98 33.82,80.02 | J56.P$1 33.52,79.98 33.84,79.98 | 30.86,77.72 J34.P$1 | 43.96,63.75 J73.P$1 | 43.67,60.99 J17.P$1 | 61.65,73.57 R1.2
  Top 0.203: 18.41,94.13 D31.1 23.33,94.13 24.34,95.15 C22.1 29.84,96.68 31.81,94.72 | 18.41,94.13 16.51,94.13 16.48,94.17 16.48,94.25 16.28,94.46 J44.P$1 | 18.41,94.13 18.41,84.61 17.57,83.77 D32.1 13.76,83.77 13.49,83.5 13.49,77.31 | C23.1 22.7,72.71 22.21,73.2 D33.1 18.72,73.2 v17.62,74.3 17.14,74.77 17.14,77.31 C21.1 13.49,77.31 | 13.49,77.31 13.49,76.84 12.86,76.2 J45.P$1 9.68,74.77 v9.53,74.77 | J47.P$1 71.93,88.13 72.06,88.13 72.24,87.95 76.36,87.95 76.76,88.34 | C25.1 84.61,78.42 85.72,77.31 | 86.52,79.38 86.52,80.01 86.04,80.49 84.95,80.49 D5.1 83.21,80.62 82.39,81.44 82.39,94.62 80.33,96.68 C24.1 77.37,90.96 | 86.52,79.38 86.52,78.11 85.72,77.31 | 77.37,90.96 77.37,88.96 76.76,88.34 | D2.1 77.38,90.95 77.37,90.96 | D6.1 79.08,70.01 77.37,70.01 | 77.37,70.01 C26.1 77.31,66.83 76.83,66.52 69.91,66.52 67.82,68.61 67.7,68.72 J7.P$1 | J52.P$1 87.63,79.85 87.15,79.38 86.52,79.38 | 77.37,70.01 77.37,75.41 | 77.37,75.41 77.37,76.26 77.79,76.68 77.79,87.31 76.76,88.34 | 77.37,75.41 77.33,75.45 | J57.P$1 87.15,75.88 85.72,77.31 | J62.P$1 72.07,54.77 | 72.07,54.77 74.3,54.77 | 74.3,54.77 J60.P$1 | D1.A 72.07,54.77 | 74.3,54.77 J64.P$1 v74.3,63.5 | 49.85,15.72 J68.P$1 | 52.23,15.72 49.85,15.72 | 52.23,15.72 53.02,15.72 J66.P$1 | 49.85,15.72 D3.A | J70.P$1 52.39,15.88 52.23,15.72 | U4.P$6 29.37,53.67 | 29.37,53.67 26.67,53.67 | 26.67,53.67 U4.P$5 25.07,53.67 23.81,54.93 J1.P$1 v21.27,55.56 | C16.1 26.83,50.8 26.67,50.96 26.67,53.67 | U4.P$10 29.63,55.67 29.37,55.4 29.37,53.67 | U5.5 42.23,34.61 41.7,35.14 R9.2 40.8,36.04 40.64,36.2 40.64,38.89 41.59,39.85 | U6.5 49.59,34.51 50.06,34.98 | 50.06,34.98 51.28,34.98
  Top 0.203: 51.28,34.98 C9.1 54.19,34.98 55.25,36.04 IC1.1 57.79,36.04 58.21,36.46 C18.2 | R2.2 51.59,37.31 51.28,36.99 51.28,34.98 | C8.1 45.66,87 | J30.P$1 42.86,41.12 41.59,39.85 | 50.06,34.98 50.01,35.04 50.01,38.1 48.9,39.21 42.23,39.21 41.59,39.85 | R10.2 55.29,54.29 54.64,53.64 49.06,53.64 48.72,53.98 48.72,55.81 | 48.72,55.81 U7.8 | 48.72,55.81 U7.8 48.25,56.27 47.92,56.27 R29.2 46.99,57.47 J17.P$1 43.66,63.02 43.96,63.75 | 43.67,60.99 v40.63,57.95 40.48,57.8 J28.P$1 | 49.85,69.73 R8.2 48.85,69.69 R6.2 44.61,69.69 43.97,69.06 J73.P$1 | 49.85,69.73 50.55,69.73 C1.1 57.79,69.64 | 49.85,69.73 49.85,72.39 49.69,72.55 49.69,74.38 U1.36 49.58,79.44 49.53,79.49 | 58.42,86.52 63.18,86.52 64.86,84.84 v64.86,78.58 64.86,74.87 63.64,73.64 R1.2 57.79,69.85 57.79,69.64 | J76.P$1 59.27,69.64 57.79,69.64 | U1.44 49.53,79.49 | U1.17 v45.09,79.49 49.53,79.49 | J70.P$1 52.07,21.91 | J57.P$1 88.42,74.93 | L1.1 45.66,87 | 45.66,87 v44.45,87 | v90.09,74.59 87.88,75.88 J57.P$1 | J70.P$1 v52.23,24.29 | J56.P$1 32.23,79.06 31.75,78.74 31.43,78.58 30.86,77.72
  Route15 0.203: 40.49,45.4 J28.P$1 40.48,45.39 40.41,45.32 40.41,44.94 40.48,44.87 40.48,44.45 40.96,43.97 42.39,43.97 43.02,43.34 43.02,43.02 42.96,42.96 42.96,42.57 43.18,42.36 J30.P$1 | J7.P$1 66.72,69.7 65.98,69.7 65.52,70.17 65.09,70.17
  Bottom 0.178: JP5.1 60.67,78.58 64.61,78.58
  Bottom 0.203: v17.62,74.3 18.1,73.82 20.48,76.2 J34.P$1 | J47.P$1 71.91,88.11 | 64.61,78.58 v64.86,78.58 | J30.P$1 43.02,41.28 43.02,43.34 42.39,43.97 40.96,43.97 40.48,44.45 J28.P$1
  pour Route15: 13.02,104.77 86.84,104.77 99.85,82.23 50.01,0 0,82.23
!RESET
  Top 0.178: 56.62,75.41 56.58,75.37 | 56.58,75.37 S1.4 55.88,77.02 JP5.10 55.37,77.49 U1.40 | 56.58,75.37 S1.3 61.54,75.37 R1.1
A3  (via drill 0.38)
  Top 0.178: J10.P$1 35.66,87.05 39.85,82.87
  Top 0.203: IC1.3 54.77,33.5 v54.61,33.34 | 39.85,82.87 42.7,82.87 43.82,81.76 45.4,81.76 45.58,81.94 U1.9
  Route2 0.203: v89.22,83.98 85.64,80.4 65.18,80.4 61.59,83.98 45.24,83.98 42.17,87.05 J10.P$1
  Bottom 0.203: v54.61,33.34 54.61,39.05 | 54.61,39.05 J37.P$1 | 54.61,39.05 69.69,39.05 74.93,44.29 74.93,48.26 82.87,56.2 82.87,59.69 88.74,65.56 88.74,72.23 96.2,79.69 96.2,83.5 94.46,85.25 90.33,85.25 89.22,84.14 v89.22,83.98
AUD
  Top 0.203: R3.1 C17.2 40.96,31.06 40.96,29.53 41.59,28.89 42.23,28.89 | U5.1 42.23,28.89 | 42.23,28.89 42.23,27.94 43.02,27.15 R13.1
D2  (via drill 0.38)
  Top 0.178: U1.23 40.28,76.49 39.48,75.69 39.46,75.71 v39.46,75.76
  Top 0.203: D2.4 72.72,90.95 69.21,94.46 J53.P$1
  Bottom 0.178: v39.46,75.76 39.46,75.63 | 55.35,70.25 56.5,69.1 56.5,69.07 56.67,68.9 J14.P$1
  Bottom 0.203: v39.46,75.76 45.36,75.76 46.51,74.61 51.59,74.61 54.45,71.76 54.45,71.16 55.35,70.25 | J14.P$1 56.67,63.98 56.99,63.66 60.33,63.66 61.28,63.98 61.75,64.93 62.39,66.04 64.29,69.85 67.79,76.04 68.26,76.68 68.9,77.15 69.69,77.15 J42.P$1 72.71,77.31 74.93,79.85 76.99,81.92 76.99,83.98 73.66,87.31 73.66,93.19 72.39,94.46 68.43,94.46 68.25,94.63 J53.P$1
D3
  Top 0.178: U1.14 36.8,80.99 33.79,84 33.79,84.13 33.62,84.3 J23.P$1
  Top 0.203: U4.P$4 25.36,54.17 25.08,54.45 25.08,60.8 J22.P$1
  Route2 0.203: J22.P$1 24.92,77.15 23.49,78.58 23.49,82.89 25.73,85.12 25.74,85.11 28.14,85.11 28.16,85.09 28.87,85.09 28.95,85.11 29.01,85.08 29.18,85.08 29.33,84.93 32.23,84.93 J23.P$1 33.31,84.3
D5  (via drill 0.38)
  Top 0.178: U1.24 41.38,75.99 39.37,73.98 39.37,72.23 38.58,71.44 J3.P$1
  Top 0.203: R29.1 46.94,55.46 46.94,53.67 | U7.5 51.64,55.79 51.64,54.95 52.1,54.49 v52.75,54.49 53.51,54.49 53.82,54.8 C13.1 | C12.A 46.94,53.67 | 46.94,53.67 47.95,53.67 49.16,52.45 50.95,52.45 v50.96,52.46
  Route2 0.203: J24.P$1 53.18,44.45 52.71,43.97 26.19,43.97 24.45,47.15 15.88,62.55 14.13,62.71 v14.29,62.71
  Route15 0.203: v14.29,62.71 16.83,63.5 24.29,63.5 24.92,63.82 24.92,77.15 23.18,78.9 23.02,83.19 25.56,85.09 25.72,85.25 28.42,85.14 28.43,85.13 28.49,85.13 28.54,85.11 28.63,85.13 29.69,85.09 29.69,84.61 28.89,82.87 30.32,78.9 35.24,70.64 36.04,70.17 J3.P$1
  Bottom 0.203: J24.P$1 53.18,52.4 | 53.18,52.4 53.18,54.19 52.88,54.49 v52.75,54.49 | v50.96,52.46 53.12,52.46 53.18,52.4
D6  (via drill 0.38)
  Top 0.178: 34.37,71.19 J26.P$1 29.3,69.69 28.28,70.71 28.28,73.44 26.7,75.02 26.7,78.37 23.63,81.44 23.63,86.98 25.4,88.75
  Top 0.203: D31.4 24.44,94.13 24.13,93.82 24.13,90.01 25.4,88.75 26.04,88.11 J32.P$1 | U1.29 46.04,74.45 46.04,73.18 44.61,71.76 41.43,71.76 41.27,71.91 v41.12,71.91 | J18.P$1 35.73,72.94 34.9,72.36 34.37,71.19
  Bottom 0.203: v41.12,71.91 38.58,74.45 37.15,74.45 37.14,74.44 | 37.14,74.44 37.14,74.31 | J18.P$1 37.14,74.44
D7  (via drill 0.38)
  Top 0.203: U7.2 49.68,58.57 50.32,59.21 54.77,59.21 55.25,58.74 55.25,58.22 55.29,58.17 R10.1 55.89,57.33 56.47,56.76 56.47,47.3 56.36,47.19 J40.P$1 56.36,44.13 55.88,43.82 28.73,43.82 23.65,46.83 16.19,60.64 v17.14,62.55 | J5.P$1 40.96,68.58 41.43,69.06 42.67,69.06 46.58,72.97 U1.30
  Bottom 0.203: v17.14,62.55 17.14,63.34 17.67,63.34 17.72,63.37 17.83,63.34 38.26,63.34 38.89,63.98 38.89,64.61 37.94,65.56 37.94,67.47 J5.P$1
D8  (via drill 0.38)
  Top 0.203: IC1.4 56.1,32.07 v51.12,32.07 | U1.11 44.58,84.17 38.26,90.49 38.26,91.84 38.57,92.37 38.44,92.37 J8.P$1
  Bottom 0.203: J35.P$1 51.12,40.8 51.12,38.89 | 51.12,38.89 v51.12,32.07 | J8.P$1 36.24,93.79 36.2,93.82 36.2,94.99 36.24,94.99 | 51.12,38.89 34.45,38.89 33.5,37.94 32.23,37.31 32.07,37.15 30.64,37.15 28.57,40.48 4.45,81.76 13.34,98.9 14.92,100.49 38.26,100.49 38.73,100.01 36.24,94.99 | 36.24,94.98 36.24,94.99
D9  (via drill 0.38)
  Top 0.203: U1.12 44.08,83.71 37.94,89.85 37.16,89.85 36.98,89.67 36.8,89.85 J9.P$1 | J36.P$1 59.05,40.48 63.98,40.48 65.88,38.58 65.88,37.62 63.02,34.77 IC1.7 60.17,34.77 60.01,34.61 v59.85,34.61
  Route15 0.203: v59.85,34.61 62.71,34.61 63.98,33.34 66.04,33.34 70.48,37.78 70.48,41.28 79.53,50.32 79.53,55.56 86.68,62.71 86.68,67.63 94.3,75.25 94.3,84.77 93.66,85.25 92,85.25 91.98,85.22 91.92,85.22 91.88,85.2 91.77,85.22 90.87,85.22 90.82,85.2 90.72,85.22 90.61,85.22 90.58,85.25 90.33,85.25 90.33,83.66 89.38,82.71 87.95,82.71 85.62,80.38 65.35,80.38 61.91,83.82 v41.91,83.82
  Bottom 0.203: v41.91,83.82 41.91,85.88 37.94,89.85 37.16,89.85 36.98,89.67 36.85,89.67 J9.P$1
DO
  Top 0.203: D33.2 16.81,70 J41.P$1
  Bottom 0.203: J54.P$1 16.19,84.21 16.19,70.09 16.5,69.55 16.37,69.55 J41.P$1
DOUT  (via drill 0.38)
  Top 0.203: J48.P$1 83.5,93.98 v83.5,86.36 | v78.58,75.09 78.58,73.71 79,73.29 | 79,73.29 D6.2 | J50.P$1 83.66,69.69 80.06,73.29 79,73.29
  Bottom 0.203: v83.5,86.36 78.58,81.44 v78.58,75.09
GND  (via drill 0.38)
  Top 0.152: U4.P$8 31.71,54.67 33.02,55.98 J20.P$1
  Top 0.178: J33.P$1 32.41,74.47 J6.P$1 | 47.21,61.18 J19.P$1
  Top 0.203: J19.P$1 46.83,63.18 arc-28 46.99,63.82 arc49 J11.P$1 | v48.91,73.19 48.9,73.18 48.9,73.52 49.08,73.71 U1.35 | J63.P$1 69.69,63.66 | J61.P$1 64.29,56.67 | J59.P$1 79.85,56.83 | 87.88,71.29 85.74,72.71 J58.P$1 | J65.P$1 47.15,24.29 | J20.P$1 34.61,56.67 35.4,56.04 | J55.P$1 67.61,74.28
  Bottom 0.203: J65.P$1 46.99,21.75 | J29.P$1 43.66,44.45 44.45,43.66 46.36,43.66 46.99,43.02 J31.P$1 | v48.91,73.19 48.92,73.18
  other vias: 75.88,77.15 73.5,84.77 76.52,86.68 89.38,81.28 49.69,22.38 47.62,18.1 51.44,12.86 47.94,12.86 70.17,52.23 73.82,51.75 23.02,59.37 25.72,52.7 30.16,50.64 34.77,59.21 36.83,51.28 43.18,54.45 58.42,55.72 62.87,50.01 51.28,83.03 58.42,84.93 40.01,85.25 36.99,83.82 58.42,87.95 35.56,80.49 36.99,76.36 46.51,80.96 47.62,81.12 48.9,92.55 51.12,73.18 44.45,77.63 46.2,76.83 35.56,49.05 37.47,53.66 62.71,53.82 63.98,47.31 42.23,50.8 38.89,40.8 36.35,36.67 52.86,40.16 65.09,41.43 52.71,29.37 51.91,58.42 81.76,56.04 85.09,64.13 93.19,78.42 51.59,48.1 28.57,42.54 18.1,61.12 10.64,68.42 15.88,89.38 20.95,87.47 28.42,93.5 11.91,82.87 29.21,67.15 20.8,66.67 40.48,95.09 63.5,84.61 53.82,75.72 57.63,68.42 46.2,68.1 19.21,96.36
  pour Top: 13.02,104.77 86.84,104.77 99.85,82.23 50.01,0 0,82.23
  pour Bottom: 0.16,82.23 13.02,104.77 86.68,104.77 86.84,104.77 99.85,82.23 50.01,0
  pour Route2: 13.02,104.77 86.84,104.77 99.85,82.23 50.01,0 0,82.07 0,82.23
ID  (via drill 0.38)
  Top 0.178: R5.2 60.38,80.8 v62.07,80.8
  Top 0.203: U3.1 47.64,89.84 47.47,90.01 47.47,90.81 | 47.47,90.81 47.47,94.93 47.62,95.09 48.42,95.09 | 48.42,95.09 49.21,95.09 49.5,94.81 JP3.ID1 | U3.2 47.48,90.79 47.47,90.81 | R4.1 56.36,97.31 55.88,97.79 v55.25,97.79 48.58,97.79 48.42,97.63 48.42,95.09
  Bottom 0.178: v62.07,80.8 62.07,88.42 57.63,92.87 57.63,97 56.83,97.79 v55.25,97.79 54.93,97.79
N$1
  Top 0.406: JP3.VBUS1 51.45,92.22 51.75,91.92 F1.1
N$2
  Top 0.178: U1.1 49.58,82.18 49.85,81.92 53.18,81.92 54.16,82.89 C5.2 54.16,84.28 Y1.P$2
N$3
  Top 0.203: U6.1 47.19,33.53 48.26,34.61 C19.1
N$4
  Top 0.178: U1.2 49.08,84.32 49.38,84.62 Y1.P$1 52,85.71 C6.1
N$5
  Top 0.203: U7.3 U7.4
N$6
  Top 0.203: C17.1 41.33,32.39 43.97,32.39 44.13,32.54 44.13,32.55 U5.4 44.29,33.69 44.29,34.61 44.93,35.24 46.3,35.24 R12.1 46.36,34.13 45.94,33.71 R13.2
N$7  (via drill 0.38)
  Top 0.178: F1.2 51.75,87.63 52.07,87.31 54.13,87.31 54.29,87.47 v54.29,87.63
  Top 0.203: Q2.3 43.02,96.04 v43.66,96.68
  Bottom 0.178: 52.71,87.63 v54.29,87.63
  Bottom 0.203: v43.66,96.68 43.66,94.77 48.08,90.35 48.29,90.35 51,87.63 52.71,87.63
N$8
  Bottom 0.203: J74.P$1 59.53,57.63 J21.P$1
N$9
  Top 0.203: Q2.1 43.97,91.79 44.02,91.74 | 44.02,91.74 R7.1 | U3.4 44.02,91.74
N$10
  Top 0.203: R12.2 C19.2
N$11  (via drill 0.38)
  Top 0.203: R11.2 43.4,36.99 | R9.1 43.4,36.99 | 43.4,36.99 v44.61,36.99 | v44.77,29.37 44.45,29.37 44.13,29.69 U5.3 | C20.1 40.32,35.3 40.32,34.61 v40.48,34.61
  Bottom 0.203: v44.61,36.99 44.77,36.83 44.77,34.45 | 44.77,34.45 v44.77,29.37 | v40.48,34.61 40.64,34.45 44.77,34.45
N$12
  Top 0.203: R15.2 71.23,56.95 D1.C
N$13  (via drill 0.38)
  Top 0.203: U4.P$1 25.72,56.31 25.72,56.52 v25.88,56.67 | v30.8,52.39 C15.1
  Bottom 0.203: v25.88,56.67 27.15,55.4 27.15,52.55 27.3,52.39 v30.8,52.39
N$14
  Top 0.203: D31.2 22.25,90.93 22.54,90.65 22.54,84.3 22.02,83.77 D32.4 20.53,83.66
N$15
  Top 0.203: R17.2 49.04,18.18 D3.C
N$16
  Top 0.203: D32.2 17.7,80.57 19.68,78.58 24.76,78.58 26.04,77.31 26.04,76.68 26.07,76.64 D33.4
N$17
  Top 0.203: IC1.5 61.86,31.38 61.12,30.64 61.12,29.21 60.48,28.58 55.88,28.58 54.29,26.99 C14.2
N$18  (via drill 0.38)
  Top 0.203: R3.2 38.73,34.29 38.42,34.61 v38.1,34.61 | v49.69,26.83 51.22,26.83 C14.1
  Bottom 0.203: v38.1,34.61 45.88,26.83 v49.69,26.83
N$19
  Top 0.203: IC1.6 60.17,33.5 59.91,33.24 C10.1
N$20
  Top 0.203: IC1.8 61.86,37.15 62.36,37.65 C11.1 | C11.1 | R2.1 55.25,37.31 56.99,39.05 62.07,39.05 62.39,38.74 C11.1
N$21
  Top 0.178: 64.13,87.31 64.2,87.31 64.23,87.28 64.23,87.25 64.13,87.15 61.12,87.15
  Top 0.203: J71.P$1 64.13,87.31 63.82,87.31 | S2.3 60.99,89.41 60.17,88.58 60.17,87.47 60.48,87.15 61.12,87.15
N$22
  Top 0.203: D5.4 81.09,80.62 81.44,80.96 81.44,93.5 80.79,94.15 D2.2
N$23  (via drill 0.38)
  Top 0.203: D6.4 74.11,70.17 v75.88,70.17 | v86.68,84.77 86.68,84.14 86.36,83.82 D5.2
  Bottom 0.203: v75.88,70.17 77.47,70.17 81.91,74.61 81.91,80.01 v86.68,84.77
N$24
  Top 0.203: U4.P$9 31.68,55.17 31.91,55.4 31.91,55.88 29.96,57.83 JP2.1
N$25  (via drill 0.38)
  Top 0.203: U4.P$7 32.1,54.17 v32.23,54.29
  Bottom 0.203: JP2.2 26.99,58.9 27.15,59.06 31.75,59.06 31.91,58.9 31.91,58.1 31.75,57.94 31.75,56.52 32.23,56.04 v32.23,54.29
SCL  (via drill 0.38)
  Top 0.178: J15.P$1 53.34,60.96 53.69,61.31
  Top 0.203: U4.P$2 27.39,55.17 v27.94,55.72 | v31.11,58.26 31.11,59.69 J4.P$1 | U7.7 49.68,54.45 49.69,54.44 | 49.69,54.44 | 49.69,54.44 v49.67,54.42 | U1.32 47.62,74.45 47.62,73.18 v48.02,72.79 48.9,71.91 R8.1 | 53.34,61.6 arc-50 53.34,60.96 | J15.P$1 53.13,60.85 53.13,62.88 53.5,64.35 53.5,64.45 | 53.5,64.45 53.5,64.61 | J38.P$1 53.5,64.45
  Route15 0.203: J4.P$1 32.39,63.34 32.47,63.43 52.79,63.43 53.34,63.5 53.54,64.17 J38.P$1
  Bottom 0.203: v27.94,55.72 28.57,56.36 30.64,56.36 31.11,56.83 v31.11,58.26 | J15.P$1 52.85,60.47 52.85,57.6 v49.67,54.42 50.01,54.08 J13.P$1 | J4.P$1 32.39,62.11 | v48.02,72.79 48.02,71.75 J38.P$1
SDA  (via drill 0.38)
  Top 0.178: 50.49,61.29 50.09,60.88 J16.P$1
  Top 0.203: U4.P$3 28.63,54.67 28.89,54.93 28.89,56.2 28.26,56.83 28.26,60.64 J2.P$1 | U7.1 48.71,59.18 49.76,60.23 49.76,60.56 J16.P$1 | U1.31 47.08,72.3 47.18,72.2 R6.1 46.15,71.39 v46.04,71.28 | 50.09,60.88 arc-51 50.16,63.02 arc55 50.16,63.18 50.16,63.95 50.19,63.97 50.19,64.57 J12.P$1
  Route2 0.203: J2.P$1 28.57,63.34 28.68,63.44 49,63.44 49.7,63.43 50.16,63.82 50.16,66.04 J12.P$1
  Bottom 0.203: J39.P$1 46.83,57.63 J16.P$1 | J12.P$1 50.32,66.99 v46.04,71.28
SWCLK
  Top 0.178: U1.45 53.8,79.99 56.99,83.19 62.55,83.19 62.87,82.87 62.87,77.47 61.91,76.52 59.53,76.52 59.2,76.85 JP5.4
SWDIO  (via drill 0.38)
  Top 0.178: U1.46 53.34,80.49 56.67,83.82 62.55,83.82 63.66,82.71 v63.66,77.47
  Bottom 0.178: JP5.2 60.52,77.47 v63.66,77.47
USB_D+  (via drill 0.38)
  Top 0.203: JP3.D+1 50.15,92.53 49.69,92.08 49.69,87.47 v49.53,87.31 | U1.34 48.58,75.41 48.9,75.72 48.9,77.79 v48.58,78.11
  Bottom 0.203: v49.53,87.31 49.53,78.9 48.58,77.95 v48.58,78.11
USB_D-  (via drill 0.38)
  Top 0.203: JP3.D-1 50.8,92.39 50.32,91.92 v50.32,86.36 | v48.1,76.2 48.1,74.51 U1.33
  Bottom 0.203: v50.32,86.36 50.32,78.58 48.1,76.36 v48.1,76.2
USB_HOST_EN
  Top 0.178: U1.41 53.86,77.99 54.62,78.75 54.62,79.1 56.17,80.65 R5.1
VDDANA
  Top 0.178: U1.6 47.08,83.91 47.36,84.19 C3.1
  Top 0.203: L1.2 48.1,86.36 48.26,86.2 48.26,85.25 48.1,85.09 C3.1
VDDCORE
  Top 0.178: U1.43 53.75,78.99 56.83,82.07 C2.1
VIN  (via drill 0.38)
  Top 0.178: S2.2 57.31,92.01
  Top 0.203: U3.5 45.66,89.98 R7.2 v42.55,89.98 42.42,89.98 42.07,90.33 Q2.2 | U2.3 53.82,91.12 53.98,90.96 55.56,90.96 55.72,91.12 55.72,91.13 U2.1 55.72,92.71 55.88,92.87 56.52,92.87 | C7.1 57.31,92.01 57.31,92.71 57.15,92.87 56.52,92.87 | R4.2 56.52,94.77 v56.52,93.35 56.52,92.87
  Bottom 0.178: v42.55,89.98 48.13,89.98 51.59,86.52 55.56,86.52 56.52,87.47 v56.52,93.35 56.52,93.66

## Text on the board
tPlace: + | + | + | - | - | - | - | - | + | + | +